# Altium PCB PCB_main.PcbDoc
Units mm, origin at the board's own origin, x right, y up, seen from the top; angles counter-clockwise.
Board outline 33.91 x 41.91 mm, 2 copper layers (Top Layer, Bottom Layer); 36 components, 21 nets, 127 pads, 0 vias.
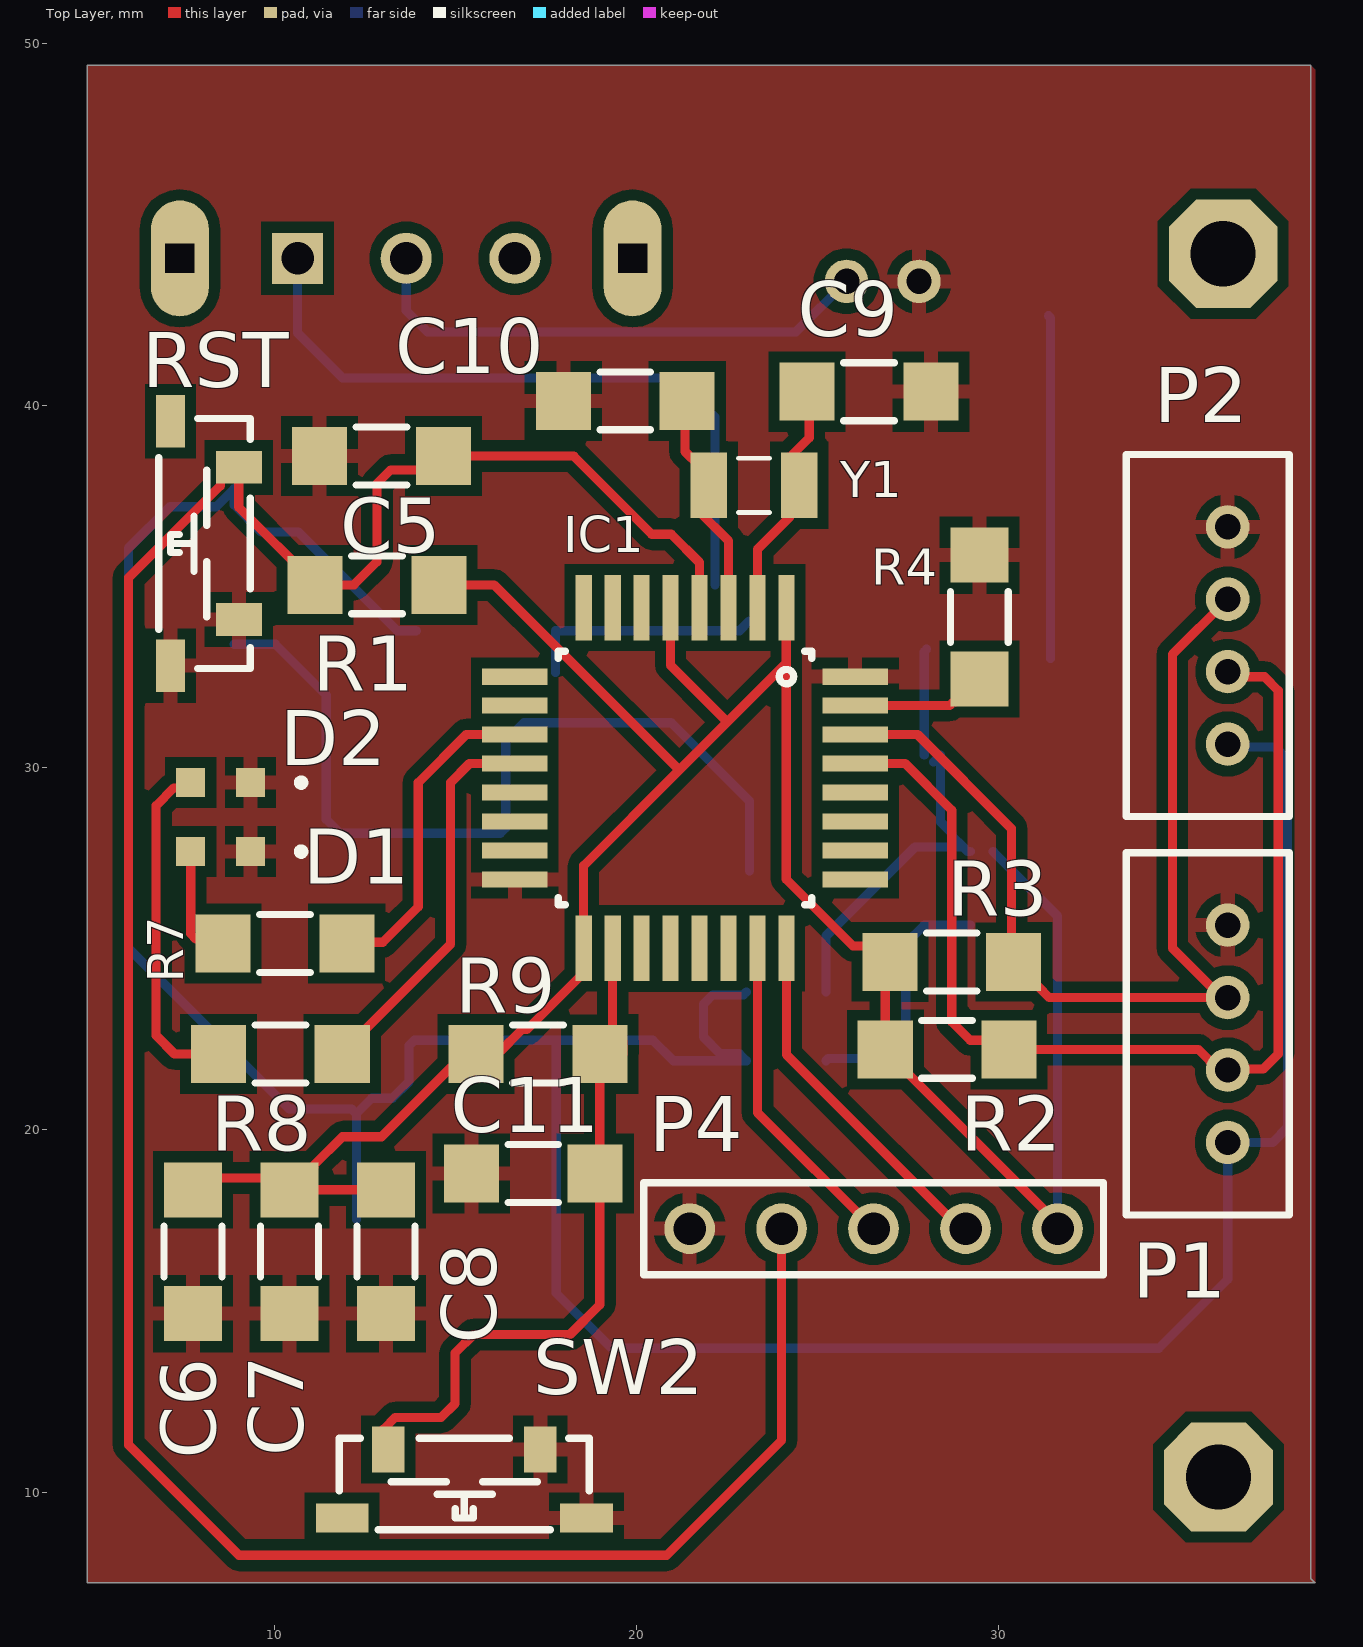
[diagram p0: Top Layer view]
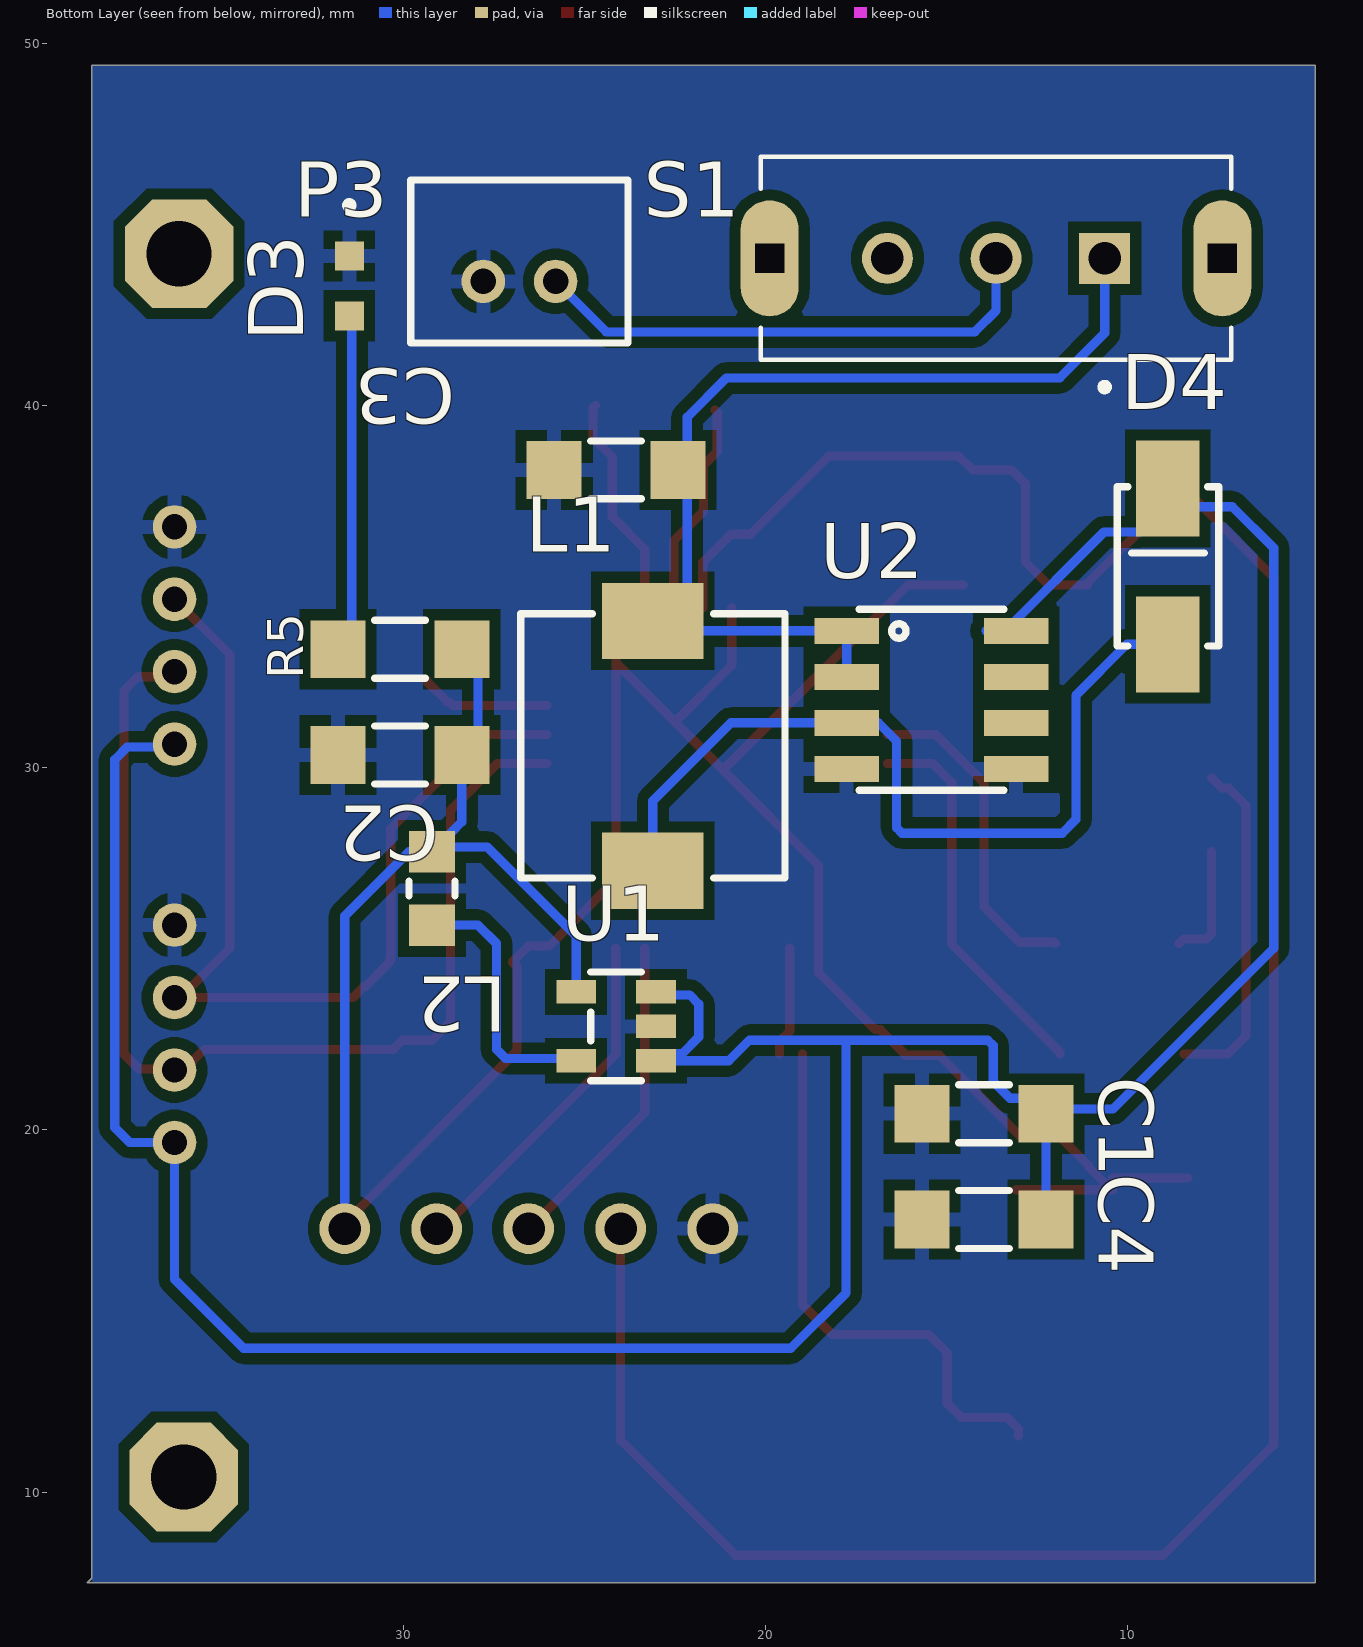
[diagram p1: Bottom Layer view, seen from below]
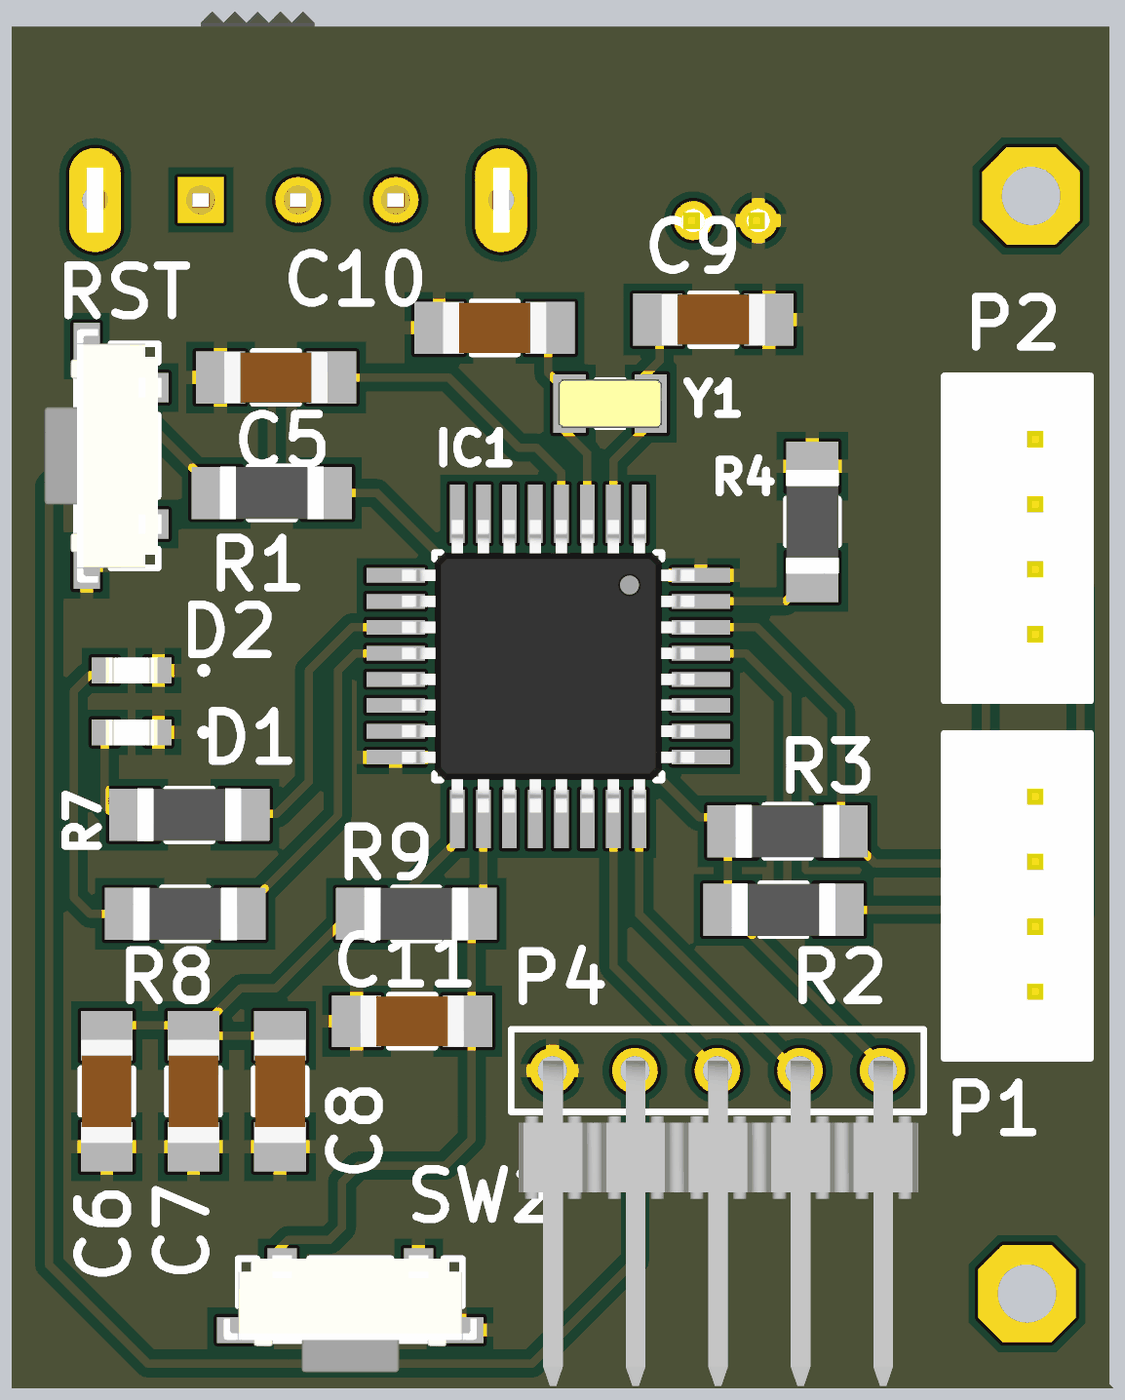
[diagram p2: 3D render of the assembled board from above, using the file's embedded part models]
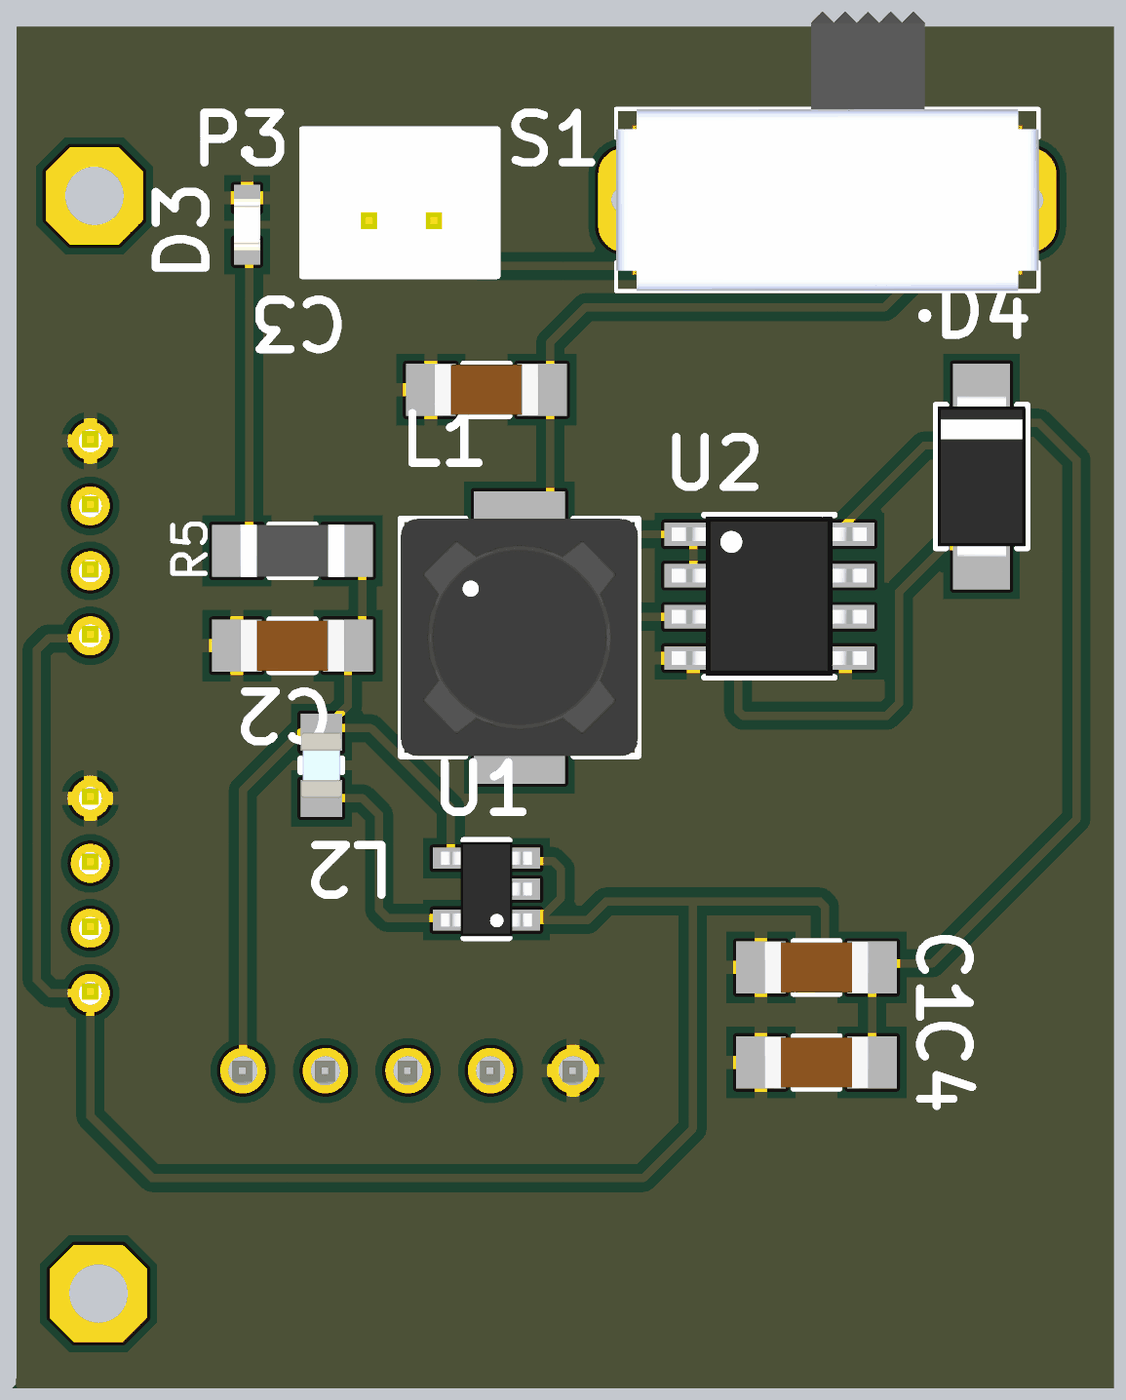
[diagram p3: 3D render of the assembled board from below, using the file's embedded part models]

## Layer stack, top to bottom
Top Solder: solder mask 0.0102, Solder Resist, Dk 3.5
Top Layer: signal copper 0.0356
Dielectric 1: dielectric 0.32, FR-4, Dk 4.8
Bottom Layer: signal copper 0.0356
Bottom Solder: solder mask 0.0102, Solder Resist, Dk 3.5

## Board outline
38.735,7.493 38.608,7.62 38.608,49.403 4.826,49.403 4.826,7.493

## Design rules (kind name [scope] priority, off if disabled: settings)
Clearance Clearance_1 [All] p1: gap=0.3 ignorepadtopadclearanceinfootprint=TRUE except(0: Arc-Hole Track-Hole SMDPad-Hole THPad-Hole Via-Hole Fill-Hole Poly-Hole Region-Hole Text-Hole)
Height [All] p1: minheight=0 maxheight=50 prefheight=12.7
HoleSize [All] p1: absolutevalues=TRUE maxlimit=3.2 minlimit=0.5 maxpercent=80.000 minpercent=20.000
MinimumSolderMaskSliver [All] p1: minsoldermaskwidth=0
PlaneClearance [All] p1: clearance=0.9
PlaneConnect [All] p1: planeconnectstyle=Relief reliefexpansion=0.4 reliefentries=4 reliefconductorwidth=0.4 reliefairgap=0.3
PolygonConnect PolygonConnect_Vias [InNet('GND') AND IsVia] p1: connectstyle=Relief reliefconductorwidth=0.4 reliefentries=4 polygonreliefangle="90 Angle" airgapwidth=0.3
PolygonConnect [All] p2: connectstyle=Relief reliefconductorwidth=0.4 reliefentries=4 polygonreliefangle="90 Angle" airgapwidth=0.3
RoutingVias [All] p1: holewidth=0.7 width=1.27 viastyle="Through Hole" minholewidth=0.7 minwidth=1.27 maxholewidth=0.7 maxwidth=1.27
ShortCircuit ShortCircuit_Text [IsText] p1: allowed=TRUE
ShortCircuit [All] p2: allowed=FALSE
SilkToSilkClearance [All] p1: silktosilkclearance=0.1
SilkToSolderMaskClearance [IsPad] p1: minsilkscreentomaskgap=0.025 clearancetoexposedcopper=TRUE
SolderMaskExpansion [All] p1: expansion=0.102 istentingtop=FALSE
Width [All] p1: maxlimit=0.254 minlimit=0.254 preferedwidth=0.254
22 further rules are at their usual default settings.

## Classes and differential pairs
component class U_MPU6050_ledMatrix: P1 P2 R2 R3
component class U_STM32: C5 C6 C7 C8 C9 C10 C11 D1 D2 IC1 P4 R1 R4 R7 R8 R9 RST SW2 Y1
component class U_Power: C1 C2 C3 C4 D3 D4 L1 L2 P3 R5 S1 U1 U2

## Components (designator, comment, footprint, x,y, rotation, side; value= is the part's Value field where it differs from the comment)
C1 "10uF" SMD_CAPACITOR_1206 13.97,17.526 r180 bottom
C2 "10uF" SMD_CAPACITOR_1206 30.099,30.353 r0 bottom
C3 "100nF" SMD_CAPACITOR_1206 24.13,38.227 r0 bottom value=10uF
C4 "100nF" SMD_CAPACITOR_1206 13.97,20.447 r180 bottom value=33uF
C5 "100nF" SMD_CAPACITOR_1206 12.954,38.608 r180 top
C6 "100nF" SMD_CAPACITOR_1206 7.747,16.637 r90 top
C7 "100nF" SMD_CAPACITOR_1206 10.414,16.637 r90 top
C8 "100nF" SMD_CAPACITOR_1206 13.081,16.637 r270 top
C9 "22pF" SMD_CAPACITOR_1206 26.416,40.386 r0 top
C10 "22pF" SMD_CAPACITOR_1206 19.685,40.132 r180 top
C11 "100nF" SMD_CAPACITOR_1206 17.145,18.796 r180 top
D1 "KPT-1608ZGC" LED_KPT-1608ZGC 8.509,27.686 r180 top
D2 "KPT-1608ZGC" LED_KPT-1608ZGC 8.509,29.591 r180 top
D3 "KPT-1608ZGC" LED_KPT-1608ZGC 31.496,43.307 r270 bottom
D4 "MBRS120T3" SMD_DO-214AC 8.89,35.56 r90 bottom
IC1 "STM32F042K6" SMD_LQFP-32 21.336,29.718 r270 top
L1 "22uH" SMD_INDUCTOR_7.3MM 23.114,30.607 r270 bottom
L2 "22uH" SMD_INDUCTOR_0805 29.21,26.67 r90 bottom value=2.2uH
P1 "Header JST 1x4" THT_HEADER_78MIL_JST_1X4_MALE 36.322,22.654 r180 top
P2 "Header JST 1x4" THT_HEADER_78MIL_JST_1X4_MALE 36.322,33.655 r180 top
P3 "Header JST 1x2" THT_HEADER_78MIL_JST_1X2_MALE 26.797,43.434 r90 bottom
P4 "Header 1x5" THT_HEADER_100MIL_1X5_MALE_90 26.543,17.272 r270 top
R1 "10K" SMD_RESISTOR_1206 12.827,35.052 r180 top value=10k
R2 "4.7k" SMD_RESISTOR_1206 28.575,22.225 r0 top
R3 "4.7k" SMD_RESISTOR_1206 28.702,24.638 r0 top
R4 "10k" SMD_RESISTOR_1206 29.464,34.163 r90 top
R5 "1k" SMD_RESISTOR_1206 30.099,33.274 r0 bottom
R7 "100" SMD_RESISTOR_1206 10.287,25.146 r0 top
R8 "100" SMD_RESISTOR_1206 10.16,22.098 r0 top
R9 "10k" SMD_RESISTOR_1206 17.272,22.098 r0 top
RST "Switch 90" SMD_SWITCH_SPST_90 8.128,36.195 r270 top (schematic designator SW1)
S1 "EG1206" SW_EG1206 13.637,44.069 r0 bottom
SW2 "Switch 90" SMD_SWITCH_SPST_90 15.24,10.287 r0 top
U1 "LM3671MF" SMD_SOT-23-5 24.13,22.86 r90 bottom
U2 "ADP1111ARZ-5" SMD_SOIC-8 15.421,31.877 r180 bottom
Y1 "CM7V-T1A-32.768KHZ-12.5PF-100PPM-TB-QC" XTAL_CM7V-T1A-32.768KHZ-12.5PF-100PPM-TB-QC 23.241,37.801 r180 top

## Footprints (in the part's own frame and the unit in brackets; to place one, negate y for a bottom-side part, rotate by r counter-clockwise, add the part's x,y. Pads: shape width x height; smd on the part's side, far side on the other; paste and mask are expansions set on the pad)
LED_KPT-1608ZGC [mm]
  rect 0.8x0.8 smd: 1(0.825,0) 2(-0.825,0)
  silkscreen extent -2.32,-0.1 -2.13,0.1, body extent -0.8,-0.4 0.8,0.4, height 1.1
SMD_CAPACITOR_1206 [mm]
  rect 1.52x1.6 smd: 1(-1.71,0) 2(1.71,0)
  silkscreen extent -0.7,-0.8 0.7,0.8, body extent -1.6,-0.8 1.6,0.8, height 1.58
SMD_DO-214AC [mm]
  rect 2.65x1.75 smd: 1(-2.15,0) 2(2.15,0)
  silkscreen extent -2.2,-1.4 2.2,1.4, body extent -2.5,-1.35 2.5,1.35, height 2.19
SMD_INDUCTOR_7.3MM [mm]
  rect 2.1x2.8 smd: 1(-3.45,0) 2(3.45,0)
  silkscreen extent -3.65,-3.65 3.65,3.65, body extent -3.65,-3.65 3.65,3.65, height 4
SMD_INDUCTOR_0805 [mm]
  rect 1.14x1.27 smd: 1(-1.015,0) 2(1.015,0)
  silkscreen extent -0.2,-0.64 0.2,0.64, body extent -1,-0.62 1,0.63, height 1.25
SMD_LQFP-32 [mm]
  rect 1.8x0.45 smd: 1(-4.7,2.8) 2(-4.7,2) 3(-4.7,1.2) 4(-4.7,0.4) 5(-4.7,-0.4) 6(-4.7,-1.2) 7(-4.7,-2) 8(-4.7,-2.8) 17(4.7,-2.8) 18(4.7,-2) 19(4.7,-1.2) 20(4.7,-0.4) 21(4.7,0.4) 22(4.7,1.2) 23(4.7,2) 24(4.7,2.8)
  rect 0.45x1.8 smd: 9(-2.8,-4.7) 10(-2,-4.7) 11(-1.2,-4.7) 12(-0.4,-4.7) 13(0.4,-4.7) 14(1.2,-4.7) 15(2,-4.7) 16(2.8,-4.7) 25(2.8,4.7) 26(2,4.7) 27(1.2,4.7) 28(0.4,4.7) 29(-0.4,4.7) 30(-1.2,4.7) 31(-2,4.7) 32(-2.8,4.7)
  silkscreen extent -3.5,-3.5 3.5,3.5, body extent -4.5,-4.5 4.5,4.5, height 1.45
SMD_RESISTOR_1206 [mm]
  rect 1.52x1.6 smd: 1(-1.71,0) 2(1.71,0)
  silkscreen extent -0.7,-0.8 0.7,0.8, body extent -1.62,-0.81 1.63,0.81, height 0.61
SMD_SOIC-8 [mm]
  rect 1.78x0.72 smd: 1(-2.34,1.905) 2(-2.34,0.635) 3(-2.34,-0.635) 4(-2.34,-1.905) 5(2.34,-1.905) 6(2.34,-0.635) 7(2.34,0.635) 8(2.34,1.905)
  silkscreen extent -2,-2.5 2,2.5, body extent -3,-2.45 3,2.45, height 1.75
SMD_SOT-23-5 [mm]
  rect 0.65x1.1 smd: 1(-0.95,-1.1) 2(0,-1.1) 3(0.95,-1.1) 4(0.95,1.1) 5(-0.95,1.1)
  silkscreen extent -1.5,-0.7 1.5,0.7, body extent -1.45,-1.4 1.45,1.4, height 1.45
SMD_SWITCH_SPST_90 [mm]
  rect 0.9x1.27 smd: 1(-2.1,0.885) 2(2.1,0.885)
  rect 1.45x0.8 smd: 3(-3.375,-1) 4(3.375,-1)
  silkscreen extent -3.45,-1.33 3.45,1.2, body extent -3.9,-2.3 3.9,1.3, height 3.5
SW_EG1206 [mm]
  rect 1.408x1.408 / inner round 1.408 / far side rect 1.408x1.408 hole 0.9: 1(-3,0)
  round 1.408 hole 0.9: 2(0,0) 3(3,0)
  oval 1.6x3.2 hole 0.8 square: SH1(-6.25,0) SH2(6.25,0)
  silkscreen extent -6.5,-2.8 6.5,3.66, body extent -6.5,-5.8 6.5,2.8, height 6
THT_HEADER_78MIL_JST_1X2_MALE [mm]
  round 1.2 hole 0.7: 1(0,1) 2(0,-1)
  silkscreen extent -1.7,-3 2.8,3, body extent -1.7,-3 2.8,3, height 6
THT_HEADER_78MIL_JST_1X4_MALE [mm]
  round 1.2 hole 0.7: 1(0,3) 2(0,1) 3(0,-1) 4(0,-3)
  silkscreen extent -1.7,-5 2.8,5, body extent -1.7,-5 2.8,5, height 6
THT_HEADER_100MIL_1X5_MALE_90 [mm]
  round 1.4 hole 0.9: 1(0,5.08) 2(0,2.54) 3(0,0) 4(0,-2.54) 5(0,-5.08)
  silkscreen extent -1.27,-6.35 1.27,6.35, body extent -0.3,-6.12 9.7,6.18, height 2.44
XTAL_CM7V-T1A-32.768KHZ-12.5PF-100PPM-TB-QC [mm]
  rect 1x1.8 smd: 1(-1.25,0) 2(1.25,0)
  silkscreen extent -0.43,-0.75 0.43,0.75, body extent -1.6,-0.75 1.6,0.75, height 0.35

## Part data
C1 C2 C3 C4 C5 C6 C7 C8 C9 C10 C11: library part Capacitor, "Capacitor", 0805=http://cz.farnell.com/webapp/wcs/stores/servlet/Search?catalogId=15001&langId=420&storeId=10156&categoryId=700000005423&sort=P_PRICE&pageSize=100&beginIndex=1&showResults=true&sf=502,707&pf=1010141074,1012080068,1012245578, 1206=http://cz.farnell.com/webapp/wcs/stores/servlet/Search?catalogId=15001&langId=420&storeId=10156&categoryId=700000005423&sort=P_PRICE&pageSize=100&beginIndex=1&showResults=true&sf=502,707&pf=1012245584
D1 D2 D3: "1.6x0.8mm Smd Chip Led Lamp", Package="0603 Kingbright", Availability="In Stock", Check_prices=https://www.snapeda.com/parts/KPT-1608ZGC/Kingbright/view-part/?ref=eda, MF=Kingbright, MP=KPT-1608ZGC, Price=None, SnapEDA_Link=https://www.snapeda.com/parts/KPT-1608ZGC/Kingbright/view-part/?ref=snap
D4: library part Diode_Schottky, "Diode Schottky", DO-214AC=http://cz.farnell.com/webapp/wcs/stores/servlet/Search?catalogId=15001&langId=420&storeId=10156&categoryId=700000043508&sort=P_PRICE&pageSize=100&showResults=true&sf=502,707&pf=1010199473, SOD-123=http://cz.farnell.com/webapp/wcs/stores/servlet/Search?catalogId=15001&langId=420&storeId=10156&categoryId=700000043508&sort=P_PRICE&pageSize=100&showResults=true&sf=502,707&pf=1010130987
IC1: "ARM Cortex-M0 32-bit MCU, 6 KB Internal RAM, 32 KB Flash, 48 MHz, 32-pin LQFP", Link=http://cz.farnell.com/stmicroelectronics/stm32f042k6t7/mcu-32bit-cortex-m0-48mhz-lqfp/dp/2469553
L1 L2: library part Inductor, "Inductor", 7.3MM=http://cz.farnell.com/webapp/wcs/stores/servlet/Search?catalogId=15001&langId=420&storeId=10156&categoryId=700000005463&sort=P_PRICE&pageSize=100&showResults=true&sf=502,707&pf=1012026164,1012026165,1012026166,1012026167,1012026168,1012026169,1012026170,1012244724, 0805=http://cz.farnell.com/webapp/wcs/stores/servlet/Search?catalogId=15001&langId=420&storeId=10156&categoryId=700000005466&sort=P_PRICE&pageSize=100&showResults=true&sf=502,707&pf=1012244717,1012248439
P1 P2: library part Header_JST_1x4
P3: library part Header_JST_1x2
P4: library part Header_1x5
R1 R2 R3 R4 R5 R7 R8 R9: library part Resistor, "Resistor", 0805=http://cz.farnell.com/webapp/wcs/stores/servlet/Search?catalogId=15001&langId=420&storeId=10156&categoryId=700000005450&sort=P_PRICE&pageSize=100&showResults=true&sf=502,707&pf=1012211743, 1206=http://cz.farnell.com/webapp/wcs/stores/servlet/Search?catalogId=15001&langId=420&storeId=10156&categoryId=700000005450&pageSize=100&showResults=true&sf=502,707&pf=1012211755
RST SW2: library part Switch_90, "Tactile Switch Right Angle", SMD_SPST_90=http://www.gme.cz/p-phap-3355r-p630-286, THT_SPST_90=http://cz.farnell.com/alps/skhhlqa010/switch-tactile-6x6mm-horiz-blk/dp/2056827
S1: Package=None, Availability=Unavailable, MP=EG1206, Price=None
U1: "Step Down Switching Regulator, Fixed, 2.7V-5.5V Input, 3.3V and 0.6A Output", Link=http://cz.farnell.com/texas-instruments/lm36713-3-nopb/ic-step-down-dc-dc-converter-5/dp/1685767
U2: "Buck, Boost Switching Regulator, Fixed, 2V-30V Input, 5V and 1.5A Output", Link=http://cz.farnell.com/analog-devices/adp1111arz-5/v-reg-step-up-down-5v-smd-soic8/dp/1439044
Y1: "LOW FREQUENCY CRYSTAL", Package="SMD-2 Micro Crystal", Availability="In Stock", Check_prices=https://www.snapeda.com/parts/CM7V-T1A-32.768kHz-12.5pF-100PPM-TB-QC/Micro+Crystal/view-part/?ref=eda, MF="Micro Crystal", MP=CM7V-T1A-32.768kHz-12.5pF-100PPM-TB-QC, Price=None, Purchase-URL=https://pricing.snapeda.com/search/part/CM7V-T1A-32.768kHz-12.5pF-100PPM-TB-QC/?ref=eda, SnapEDA_Link=https://www.snapeda.com/parts/CM7V-T1A-32.768kHz-12.5pF-100PPM-TB-QC/Micro+Crystal/view-part/?ref=snap

## Free pads (board coordinates)
  oct 3x3 hole 1.8: 3(36.195,44.196) 4(36.068,10.414)

## Nets (pads, with @x,y where several pads share a name; then routed paths per layer and width w, separated by ;. In a path a pad name is that pad's centre, name@x,y a point inside that pad or via, vN(x,y) a via of type N, cw(c..) or ccw(c..) an arc to the next point about the centre after c; other vN are vias at no path point)
+5: C1.2 C4.2 D4.2 P1.1 P2.1 U1.1 U1.3 U2.8 | length 93.3
  Bottom Layer w0.254: C1.2 C4.2 ; U2.8@13.916,33.782 13.386,33.782 10.656,36.512 9.638,36.512 8.89,37.26 D4.2 8.391,37.211 7.112,37.211 5.969,36.068 5.969,25.019 10.414,20.574 12.133,20.574 C4.2 ; U1.3 22.948,23.728 22.099,23.728 21.844,23.473 21.844,22.567 22.303,22.108 22.832,22.108 U1.1 21.016,21.91 20.447,22.479 17.78,22.479 ; P2.1 36.405,30.572 37.627,30.572 37.973,30.226 37.973,20.066 37.561,19.654 P1.1 36.322,15.875 34.417,13.97 19.304,13.97 17.78,15.494 17.78,22.479 ; C4.2 12.685,20.872 13.252,20.872 13.716,21.336 13.716,22.33 13.865,22.479 17.78,22.479
BUTTON: C11.1 IC1.18 R9.2 SW2.1 | length 18.4
  Top Layer w0.254: SW2.1@13.013,11.553 13.013,11.738 13.336,12.061 14.601,12.061 14.986,12.446 14.986,13.843 15.494,14.351 18.161,14.351 18.982,15.172 18.982,18.796 R9.2 ; IC1.18 19.336,22.729 19.617,22.448 R9.2@19.617,22.098
GND: C1.1 C2.2 C3.2 C4.1 C5.2 C6.1 C7.1 C8.2 C9.2 C10.2 C11.2 D1.2 D2.2 D3.2 IC1.16 IC1.32 P1.4 P2.4 P3.1 P4.5 R4.2 RST.2 RST.4 SW2.2 SW2.4 U1.2 U2.4 U2.5
NetC3_1: C3.1 L1.1 S1.1 U2.1 U2.2 | length 25.8
  Bottom Layer w0.254: S1.1 10.637,42.006 11.876,40.767 21.082,40.767 22.166,39.683 L1.1@22.166,35.054 ; U2.2@17.761,32.632 U2.1 22.839,33.782 L1.1
NetC9_1: C9.1 IC1.2 Y1.1 | length 6.2
  Top Layer w0.254: IC1.2 23.336,36.037 24.237,36.938 24.237,37.338 24.237,38.588 24.765,39.116 24.765,39.946 C9.1@24.706,40.005
NetC10_1: C10.1 IC1.3 Y1.2 | length 6
  Top Layer w0.254: C10.1@21.395,39.878 21.336,39.819 21.336,38.735 21.717,38.354 21.717,37.085 22.536,36.266 IC1.3
NetD1_1: D1.1 R7.1 | length 3.3
  Top Layer w0.254: D1.1 7.684,25.422 7.833,25.273 8.45,25.273 R7.1
NetD2_1: D2.1 R8.1 | length 9.5
  Top Layer w0.254: D2.1@7.684,29.718 7.411,29.445 7.22,29.445 6.731,28.956 6.731,22.606 7.239,22.098 R8.1
NetD3_1: D3.1 R5.2 | length 9.5
  Bottom Layer w0.254: D3.1@31.369,42.482 31.428,42.423 31.428,36.068 R5.2@31.428,33.02
NetD4_1: D4.1 L1.2 U2.3 | length 23.9
  Bottom Layer w0.254: D4.1 10.024,33.41 11.43,32.004 11.43,28.575 11.811,28.194 16.234,28.194 16.383,28.343 16.383,30.734 16.891,31.242 U2.3 20.955,31.242 23.114,29.083 L1.2
NetIC1_11: IC1.11 R7.2 | length 9
  Top Layer w0.254: R7.2 12.032,25.181 12.989,25.181 13.97,26.162 13.97,29.591 15.297,30.918 IC1.11
NetIC1_12: IC1.12 R8.2 | length 10.7
  Top Layer w0.254: R8.2 11.87,22.138 14.859,25.127 14.859,29.591 15.386,30.118 IC1.12
NetIC1_29: IC1.29 P1.2 P2.2 R2.2 | length 30.4
  Top Layer w0.254: IC1.29 27.413,30.118 28.702,28.829 28.702,22.987 29.21,22.479 30.031,22.479 R2.2 35.506,22.225 36.077,21.654 P1.2 36.35,21.682 37.303,21.682 37.719,22.098 37.719,32.131 37.338,32.512 36.465,32.512 P2.2
NetIC1_30: IC1.30 P1.3 P2.3 R3.2 | length 27.6
  Top Layer w0.254: IC1.30 27.756,30.918 30.353,28.321 30.353,24.697 R3.2 30.412,24.598 31.045,23.965 31.085,23.965 31.396,23.654 P1.3@36.163,23.654 ; P1.3 P1.3@36.163,23.654 ; P2.3 34.798,33.131 34.798,25.019 P1.3@36.163,23.654
NetIC1_31: IC1.31 R4.1 | length 3.6
  Top Layer w0.254: IC1.31 28.642,31.718 28.744,31.82 28.791,31.82 29.353,32.382 R4.1@29.353,32.415
NetL2_1: L2.1 U1.5 | length 7.2
  Bottom Layer w0.254: U1.5 25.291,21.971 27.178,21.971 27.432,22.225 27.432,25.146 27.941,25.655 L2.1
NetP3_2: P3.2 S1.2 | length 14.4
  Bottom Layer w0.254: S1.2 13.637,42.624 14.224,42.037 24.4,42.037 P3.2
NRST: C5.1 IC1.4 P4.4 R1.2 RST.1 | length 74.8
  Top Layer w0.254: IC1.4 21.736,35.668 20.955,36.449 20.419,36.449 18.26,38.608 C5.1 14.283,38.227 13.208,38.227 12.827,37.846 12.827,35.687 12.192,35.052 R1.2 11.117,35.092 9.013,37.196 RST.1 8.828,38.295 8.505,37.972 8.505,37.787 5.969,35.251 5.969,11.303 9.017,8.255 20.828,8.255 24.003,11.43 P4.4
SWCLK: IC1.24 P4.2 | length 9.9
  Top Layer w0.254: IC1.24 24.136,22.08 28.944,17.272 P4.2
SWDIO: IC1.23 P4.3 | length 9.1
  Top Layer w0.254: IC1.23 23.336,20.479 P4.3
VCC: C2.1 C6.2 C7.2 C8.1 IC1.1 IC1.5 IC1.17 L2.2 P4.1 R1.1 R2.1 R3.1 R5.1 R9.1 U1.4 | length 83.2
  Top Layer w0.254: C6.2@8.335,18.669 C7.2@10.414,18.669 ; C7.2 C7.2@10.454,18.347 ; C8.1 C7.2@10.454,18.347 ; R1.1 16.061,35.052 21.175,29.938 ; R9.1@16.162,22.063 15.205,22.063 12.954,19.812 11.879,19.812 11.087,19.02 11.087,18.98 C7.2@10.454,18.347 ; R9.1@16.197,22.138 16.83,22.771 16.964,22.771 18.536,24.343 IC1.17 18.536,27.299 21.175,29.938 ; IC1.5 20.936,32.83 22.501,31.264 ; IC1.1 24.13,34.412 24.13,32.893 ; P4.1 31.623,17.427 26.865,22.185 R2.1 26.865,24.511 R3.1 26.554,25.076 25.978,25.076 24.13,26.924 24.13,32.893 ; 21.175,29.938 22.501,31.264 ; 22.501,31.264 24.13,32.893
  Bottom Layer w0.254: U1.4 25.23,25.357 27.686,27.813 L2.2@29.017,27.813 ; C2.1@27.94,30.353 27.94,33.206 R5.1@28.008,33.274 ; C2.1@28.194,30.158 C2.1 28.389,28.506 28.702,28.193 28.702,28.128 L2.2@29.017,27.813 ; L2.2 29.145,27.685 L2.2@29.017,27.813 ; 29.846,27.685 31.623,25.908 P4.1
pads on no net: IC1.6 IC1.7 IC1.8 IC1.9 IC1.10 IC1.13 IC1.14 IC1.15 IC1.19 IC1.20 IC1.21 IC1.22 IC1.25 IC1.26 IC1.27 IC1.28 RST.3 S1.3 S1.SH1 S1.SH2 SW2.3 U2.6 U2.7

## Polygon pours and split planes (outlines as drawn)
GND on Top Layer "GND_L01_P000" (solid, pour order 0): 4.826,49.403 38.608,49.403 38.735,49.276 38.735,7.493 4.826,7.493
GND on Bottom Layer "GND_L02_P002" (solid, pour order 2): 4.826,49.403 38.608,49.403 38.608,7.62 38.735,7.493 4.826,7.493

## Silkscreen, mask and mechanical layers (free items; w line width, h text height)
Mechanical 1:
  lines w0.254: 4.826,7.62 4.826,49.403 38.608,49.403 38.735,49.276 38.735,41.402 38.735,7.62 4.826,7.62